# Allegro board SCHEMA_PLACUTA.brd
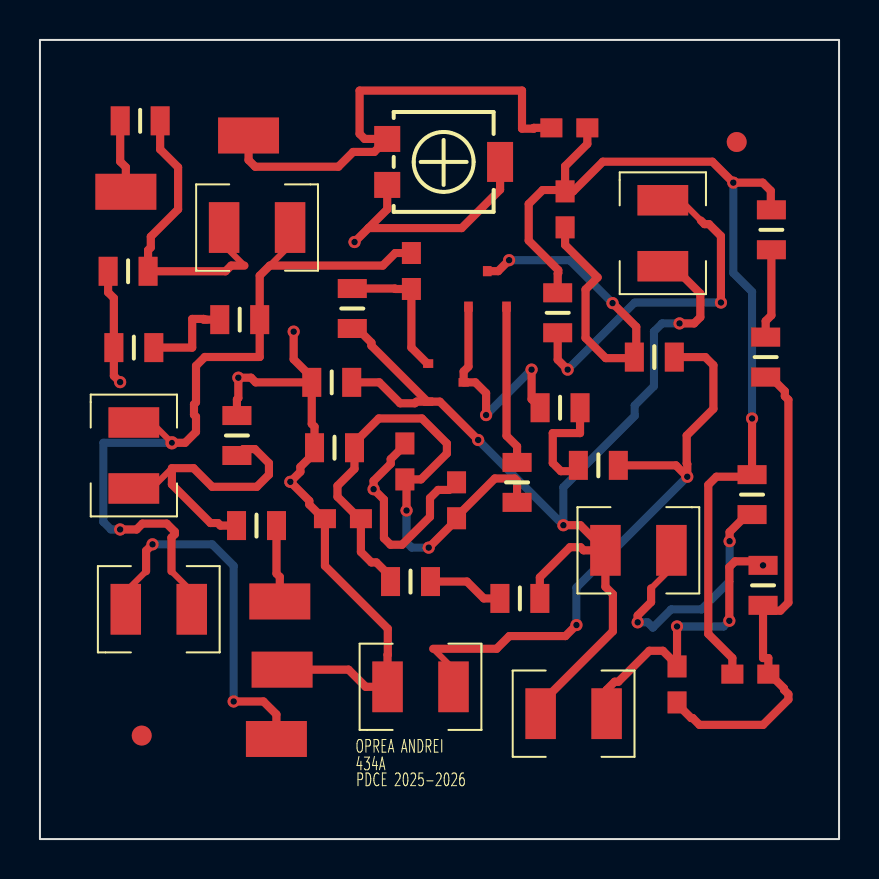
[diagram p0: board, top side]
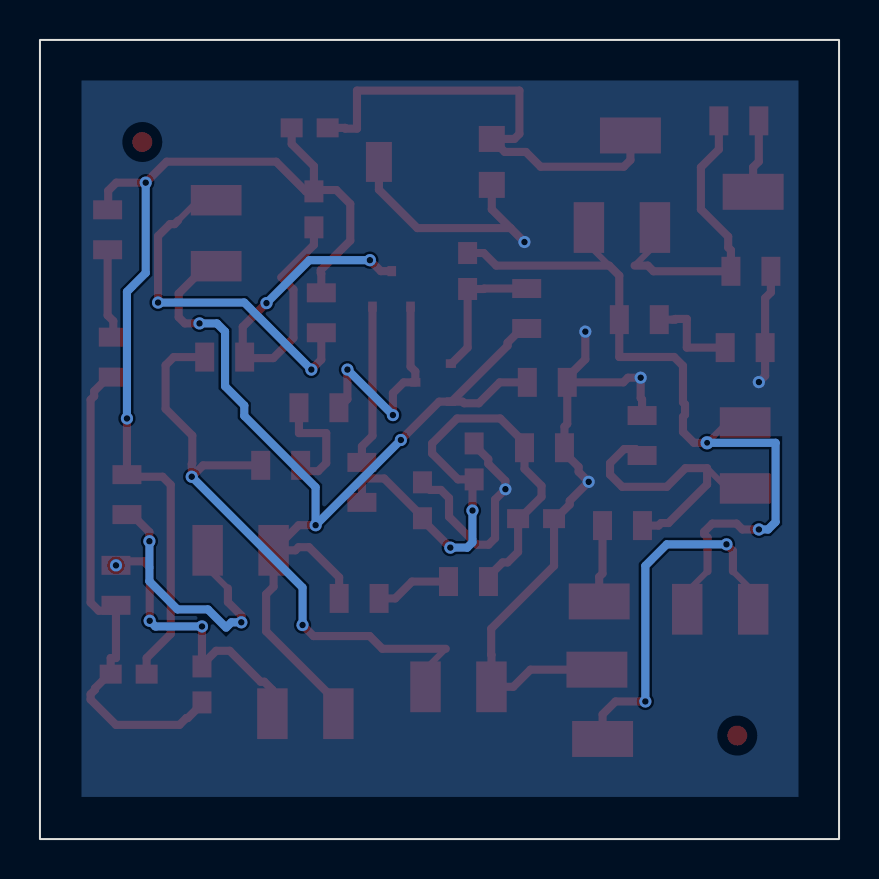
[diagram p1: board, bottom side, seen from below]

Outline 40 x 40 mm; copper layers: TOP, BOTTOM. Coordinates in mm from the lower left corner of the outline.
Outline path: rectangle 0,0 40,40

## Design rules (mm)
constraint set DEFAULT: min track width 0.127

## Placement (name value [footprint] x y rotation side)
C3  4.7u  [CAPC2008X126N_0805]  18.59 28.43 90 top
C5  4.7u  [CAPC2008X126N_0805]  26.29 31.52 270 top
C12  1n  [CAPC2008X126N_0805]  31.89 7.74 90 top
C13  4.7n  [CAPC2008X126N_0805]  35.56 8.26 0 top
C14  4.7u  [CAPC2008X126N_0805]  26.5 35.6 0 top
C15  4.7u  [CAPC2008X126N_0805]  20.85 16.96 90 top
C16  4.7u  [CAPC2008X126N_0805]  15.17 16.04 180 top
C17  4.7u  [CAPC2008X126N_0805]  18.27 18.9 90 top
J4  Power  [1210RF_WV_12D]  19.05 7.62 180 top
J5  Radio_mag_IN  [1210RF_WV_12D]  10.87 30.61 0 top
J10  Pickup_ceramic_IN  [1210RF_WV_12D]  4.7 19.2 90 top
J11  Pickup_magnetic_IN  [1210RF_WV_12D]  5.95 11.5 180 top
J12  TP  [SMD_PAD_3-05_1-80]  10.44 35.22 0 top
J13  RN1  [1210RF_WV_12D]  31.18 30.33 90 top
J14  RN2  [1210RF_WV_12D]  29.96 14.45 0 top
J15  RN3  [1210RF_WV_12D]  26.71 6.27 0 top
J16  Radio_mag  [SMD_PAD_3-05_1-80]  4.3 32.4 0 top
J17  Pickup_ceramic  [SMD_PAD_3-05_1-80]  12.01 11.89 0 top
J18  Pickup_magnetic  [SMD_PAD_3-05_1-80]  11.84 5.01 0 top
J19  GND  [SMD_PAD_3-05_1-80]  12.12 8.48 0 top
NOREF  -  [unnamed]  5.09 5.18 0 top
NOREF#2  -  [unnamed]  34.88 34.89 0 top
P1  50K  [TS53YL]  17.38 32.74 180 top
Q8  BC846B  [SOT23]  22.39 27.54 90 top
Q9  BC846B  [SOT23]  20.32 22.86 0 top
R1  47k  [RES2012X50N_0805]  10 26 0 top
R2  100k  [RES2012X50N_0805]  26.04 21.59 0 top
R4  15k  [RES2012X50N_0805]  30.75 24.12 0 top
R5  1k  [RES2012X50N_0805]  14.74 19.59 0 top
R8  220k  [RES2012X50N_0805]  35.65 17.24 90 top
R9  1  [RES2012X50N_0805]  23.88 17.85 90 top
R13  1000k  [RES2012X50N_0805]  10.84 15.69 0 top
R14  15k  [RES2012X50N_0805]  9.86 20.2 270 top
R15  100k  [RES2012X50N_0805]  27.95 18.71 0 top
R18  2.7k  [RES2012X50N_0805]  4.7 24.6 0 top
R19  330k  [RES2012X50N_0805]  15.63 26.56 90 top
R20  15k  [RES2012X50N_0805]  24.02 12.04 0 top
R21  15k  [RES2012X50N_0805]  18.55 12.89 0 top
R22  1k  [RES2012X50N_0805]  14.61 22.86 0 top
R23  100k  [RES2012X50N_0805]  25.92 26.34 90 top
R24  68k  [RES2012X50N_0805]  36.2 12.7 270 top
R25  510k  [RES2012X50N_0805]  36.33 24.12 90 top
R26  330k  [RES2012X50N_0805]  36.61 30.5 90 top
R27  100k  [RES2012X50N_0805]  5.02 35.95 180 top
R28  4.7k  [RES2012X50N_0805]  4.41 28.42 0 top

## Library data of the parts
C3 C5 C12-C17 = C
J4 J5 J10 J11 J13-J15 = CON2
J12 J16-J19 = CON1
P1 = POT
Q8 Q9 = BC846B
R1 R2 R4 R5 R8 R9 R13-R15 R18-R28 = R

## Footprints (pads in the part's own frame, mm; a bottom-side part is the same pattern mirrored in y, then rotated)
1210RF_WV_12D
  rect 1.524x2.54 smd: 1(-1.651,0) 2(1.651,0)
CAPC2008X126N_0805
  rect 1.1x0.95 smd: 1(-0.9,0) 2(0.9,0)
RES2012X50N_0805
  rect 0.95x1.45 smd: 1(-1,0) 2(1,0)
SMD_PAD_3-05_1-80
  rect 3.05x1.8 smd: 1(0,0)
SOT23
  rect 0.508x0.432 smd: 1(-0.889,0.94) 2(-0.889,-0.965) 3(0.889,0)
TS53YL
  rect 1.3x1.3 smd: 1(0,0) 3(0,-2.3)
  rect 1.3x2 smd: 2(-5.65,-1.15)
unnamed
  round 1 smd: (0,0)

## Nets
0: C15.2 C16.2 C17.2 J4.2 J19.1 P1.1 P1.2(T) R5.1 R14.1 R18.1 R22.1 R28.1
N23015: J4.1 R4.2 R15.2
N23075: C5.2 Q8.3 R4.1
N23155: C14.1 J12.1 P1.3
N23191: Q8.1 Q9.3 R2.1
N23209: Q8.2(E) R9.2
N23247: C3.1 Q9.1 R19.2
N23277: J13.1 J14.1 J15.1 Q9.2(E) R19.1 R20.2 R22.2
N23301: C15.1 C16.1 C17.1 R5.2 R9.1 R21.1
N23451: J10.1 R13.1 R14.2
N23465: C3.2 J5.2 J10.2 J11.1 R1.2
N24210: C5.1 C13.1 C14.2 R8.2 R23.2 R26.2
N24559: R20.1 R21.2
N25935: J13.2 R23.1
N26214: J14.2 R8.1
N26583: C12.2 J15.2 R24.1
N26595: C12.1 C13.2 R24.2 R25.1
N26599: R25.2 R26.1
N27239: J17.1 R13.2
N28496: J5.1 R27.1 R28.2
N35593: J11.2 J18.1
N36567: J16.1 R27.2
N230431: R2.2 R15.1
N235231: R1.1 R18.2

## Via types
v1: diameter 0.61, hole 0.33, TOP to BOTTOM, 29 vias
v2: diameter 0.66, hole 0.305, TOP to BOTTOM, 1 via

## Routing (per net, layer and track width the routed paths; a pad name or vN(x,y) marks a point on that pad's centre or on a via; arc(x,y) is an arc through that point)
0: length 61.7
  TOP w0.305: 17.4,8.51 J4.2
  TOP w0.406: C17.2 18.27,19.73 17.56,19.02 17.56,18.79 16.7,17.93 v1(16.7,17.51) 17.22,16.99 17.22,15.06 17.55,14.73 18.12,14.73 19.52,16.13 19.52,17.07 19.93,17.48 20.47,17.48 C15.2 20.85,17.78 ; R18.1 3.7,23.19 v1(4.01,22.87) ; R18.1 3.7,27.08 3.41,27.36 R28.1 ; R18.1 3.6,24.7 ; 17.4,8.51 17.4,9.22 17.41,9.23 17.41,10.53 14.27,13.67 C16.2 14.19,16.04 13.48,16.75 13.48,16.93 v1(12.53,17.88) 13.04,18.38 13.04,18.63 13.74,19.34 R5.1 13.74,20.64 13.61,20.78 R22.1 ; R22.1 13.61,23.11 12.7,24.02 v1(12.7,25.4) ; R22.1 10.8,22.86 10.57,23.09 v1(9.93,23.09) 9.93,22.08 9.86,22 R14.1 ; J4.2 16.31,7.62 15.45,8.48 J19.1 ; P1.2 23.03,32.51 21.11,30.58 16.44,30.58 ; 16.44,30.58 v1(15.75,29.89) ; 16.44,30.58 17.38,31.52 P1.1
N23015: length 31.7
  TOP w0.305: J4.1 20.7,8.51 19.68,9.53
  TOP w0.406: R15.2 31.83,18.71 v1(32.4,18.14) 32.4,18.77 32.37,18.8 32.37,20.2 33.71,21.54 33.71,23.72 33.3,24.12 R4.2 ; v1(26.86,10.71) 26.3,10.16 23.5,10.16 22.86,9.53 19.68,9.53
  BOTTOM w0.406: v1(32.4,18.14) 26.86,12.59 v1(26.86,10.71)
N23075: length 20.2
  TOP w0.406: v1(23.48,28.98) 22.94,28.43 Q8.3 ; R4.1 29.85,24.22 29.85,25.64 v1(28.66,26.83) ; R4.1 29.7,24.07 28.32,24.07 27.31,25.08 27.31,27.51 27.91,28.11 26.29,29.74 C5.2 ; R4.1 29.75,24.37
  BOTTOM w0.406: v1(28.66,26.83) 26.51,28.98 v1(23.48,28.98)
N23155: length 24.1
  TOP w0.406: C14.1 24.72,35.6 24.72,35.56 24.13,35.56 24.13,37.47 16,37.47 16,35.3 16.26,35.04 P1.3 16.73,34.39 15.68,34.39 14.94,33.65 10.78,33.65 10.44,33.99 J12.1
N23191: length 11.6
  TOP w0.406: v1(22.33,21.22) 22.33,22.32 21.79,22.86 Q9.3 21.21,23.41 21.45,23.65 Q8.1 ; v1(24.61,23.5) 24.61,22.02 R2.1
  BOTTOM w0.406: v1(22.33,21.22) v1(24.61,23.5)
N23209: length 8
  TOP w0.406: Q8.2 23.35,20.19 23.88,19.66 R9.2
N23247: length 7.1
  TOP w0.406: Q9.1 19.39,23.8 18.59,24.6 C3.1 17.79,27.53 17.76,27.56 R19.2
N23277: length 55.6
  TOP w0.305: 32.07,28.68 J13.1 ; 25.06,5.39 J15.1 ; 28.31,13.56 J14.1
  TOP w0.406: 19.39,21.89 Q9.2 20.02,21.89 v1(21.93,19.98) ; 19.39,21.89 18.85,21.89 18.77,21.81 18.03,21.81 16.98,22.86 R22.2 ; 19.39,21.89 16.59,24.7 16.59,24.85 15.88,25.56 R19.1 ; v1(32.01,25.81) 32.74,25.81 33.06,26.12 33.06,27.31 31.69,28.68 ; 28.31,13.56 28.31,12.63 28.68,12.26 28.68,10.4 25.06,6.78 J15.1 ; v1(26.2,15.71) 27.05,15.71 J14.1 27.21,14.45 27.06,14.61 26.53,14.61 25.02,13.1 R20.2
  BOTTOM w0.406: v1(32.01,25.81) 31.14,25.81 30.74,25.4 30.74,22.67 29.77,21.7 29.77,21.18 26.2,17.61 v1(26.2,15.71) v1(21.93,19.98)
N23301: length 28.9
  TOP w0.406: R9.1 23.88,17.92 23.76,18.05 22.77,18.05 20.85,16.13 C15.1 20.85,15.98 v1(19.46,14.59) ; v1(18.35,16.44) 18.35,17.92 C17.1 19.07,18 20.37,19.3 20.37,19.8 19.12,21.05 16.96,21.05 15.74,19.84 R5.2 15.74,18.53 14.89,17.68 14.89,17.13 15.99,16.04 C16.1 16.07,14.37 16.59,13.85 16.84,13.85 17.55,13.14 R21.1
  BOTTOM w0.406: v1(19.46,14.59) 18.61,14.59 18.35,14.85 v1(18.35,16.44)
N23451: length 15.3
  TOP w0.305: 6.6,18.57 5.59,17.55 J10.1
  TOP w0.406: R14.2 10.18,19.52 10.76,19.52 11.46,18.82 11.46,18.24 10.85,17.63 8.62,17.63 7.69,18.57 6.6,18.57 6.6,17.75 8.54,15.82 8.91,15.82 9.04,15.69 R13.1
N23465: length 40.8
  TOP w0.305: J5.2 12.52,29.72 11.5,28.71 ; J10.2 5.59,20.85 v2(6.6,19.84) ; J11.1 7.6,12.39 6.58,13.41
  TOP w0.406: 6.58,13.41 6.58,15.09 6.75,15.26 6.75,15.38 6.34,15.79 5.13,15.79 4.84,15.5 v1(4.01,15.5) ; v2(6.6,19.84) 7.27,19.84 7.81,20.38 7.81,21.14 7.71,21.24 7.71,21.76 7.81,21.86 7.81,23.69 8.26,24.13 11,24.13 R1.2 11,28.2 11.5,28.71 17.16,28.71 17.79,29.33 C3.2
  BOTTOM w0.406: v1(4.01,15.5) 3.55,15.5 3.17,15.88 3.17,19.84 v2(6.6,19.84)
N24210: length 50.7
  TOP w0.406: C5.1 26.29,33.68 27.4,34.79 C14.2 ; C5.1 26.22,32.49 25.16,32.49 24.47,31.79 24.47,29.96 25.95,28.48 25.95,28.33 25.92,28.31 R23.2 ; C5.1 26.69,32.42 28.18,33.91 33.66,33.91 v1(34.71,32.86) 36.18,32.86 36.58,32.45 36.58,31.53 R26.2 ; C13.1 34.66,9.06 33.45,10.27 33.45,17.73 33.86,18.14 35.54,18.14 R8.2 v1(35.65,21.05)
  BOTTOM w0.406: v1(34.71,32.86) 34.71,28.33 35.65,27.4 v1(35.65,21.05)
N24559: length 3.8
  TOP w0.406: R21.2 21.37,12.89 22.22,12.04 R20.1
N25935: length 18.1
  TOP w0.305: 33.08,30.96 32.07,31.98 J13.2
  TOP w0.406: 33.08,30.96 33.26,30.78 33.49,30.78 34.09,30.18 v1(34.09,26.86) ; R23.1 25.92,24 v1(26.41,23.5)
  BOTTOM w0.406: v1(34.09,26.86) 29.77,26.86 v1(26.41,23.5)
N26214: length 13.9
  TOP w0.305: 30.59,12.55 31.61,13.56 J14.2
  TOP w0.406: v1(34.52,14.91) 34.52,15.37 35.4,16.24 R8.1 ; v1(29.92,10.85) 29.92,11.19 30.59,11.86 30.59,12.55
  BOTTOM w0.406: v1(34.52,14.91) 34.52,12.9 33.11,11.49 31.59,11.49 30.68,10.58 30.42,10.85 v1(29.92,10.85)
N26583: length 16
  TOP w0.305: 28.36,5.39 J15.2
  TOP w0.406: J15.2 28.36,7.47 28.77,7.88 28.95,7.88 30.5,9.42 31.18,9.42 31.89,8.71 ; C12.2 31.89,8.71 ; 31.89,8.71 v1(31.89,10.64) ; v1(36.2,13.7) 35.99,13.9 34.79,13.9 34.51,13.61 v1(34.51,10.93)
  BOTTOM w0.406: v1(34.51,10.93) 34.22,10.64 v1(31.89,10.64)
N26595: length 25.5
  TOP w0.406: R25.1 36.58,23.12 37.29,22.42 37.29,22.17 37.47,21.99 37.47,11.84 37.06,11.43 36.47,11.43 R24.2 36.2,9.06 36.46,9.06 C13.2 36.54,8.26 37.24,7.55 37.24,7.47 37.47,7.25 37.47,6.99 36.2,5.71 33.02,5.71 32.67,6.06 32.6,6.06 31.89,6.76 C12.1
N26599: length 4.5
  TOP w0.406: R26.1 36.61,26.21 36.33,25.93 R25.2
N27239: length 3.9
  TOP w0.406: J17.1 12.01,13.12 11.84,13.29 R13.2
N28496: length 15.8
  TOP w0.305: J5.1 9.22,29.72 10.23,28.71
  TOP w0.406: R27.1 6.02,34.52 6.91,33.63 6.91,31.52 5.55,30.16 5.55,29.61 5.41,29.48 R28.2 9.29,28.42 9.57,28.71 10.23,28.71
N35593: length 18.7
  TOP w0.305: J11.2 4.3,12.39 5.31,13.41
  TOP w0.406: 5.31,13.41 5.31,14.43 v1(5.63,14.75) ; v1(9.7,6.89) 11.19,6.89 11.84,6.24 J18.1
  BOTTOM w0.406: v1(9.7,6.89) 9.7,13.68 8.62,14.75 v1(5.63,14.75)
N36567: length 3.7
  TOP w0.406: R27.2 4.02,33.91 4.3,33.63 J16.1
N230431: length 5.7
  TOP w0.406: R2.2 27.03,20.32 25.67,20.32 25.67,18.82 26.08,18.41 26.66,18.41 R15.1
N235231: length 4.8
  TOP w0.127: 8.33,26 8.33,26.04
  TOP w0.406: R1.1 8.19,26 8.19,26.04 7.62,26.04 7.62,24.6 R18.2

## Copper pours and planes (outline as drawn; the poured copper is in the pictures)
0 on BOTTOM: 2.03,2.11 2.03,37.97 37.92,37.97 37.92,2.11

## Text on the board
Ref Des/Silkscreen Top: OPREA ANDREI | 434A | PDCE 2025-2026
XSECTION_CHART: *  SURFACE | L1 TOP CONDUCTOR | *  DIELECTRIC | L2 BOTTOM CONDUCTOR | DESIGN CROSS SECTION CHART | ___________________________ | TOTAL THICKNESS 62.9921 MIL | 1-2
BODY_CENTER: FIGURE | FINISHED_SIZE | 12.0 | 13.0 | DRILL CHART: TOP to BOTTOM | ALL UNITS ARE IN MILS | PLATED | QTY | 1 | 29
